# EAGLE board IR Thermometer (EAGLE 7.6.0)
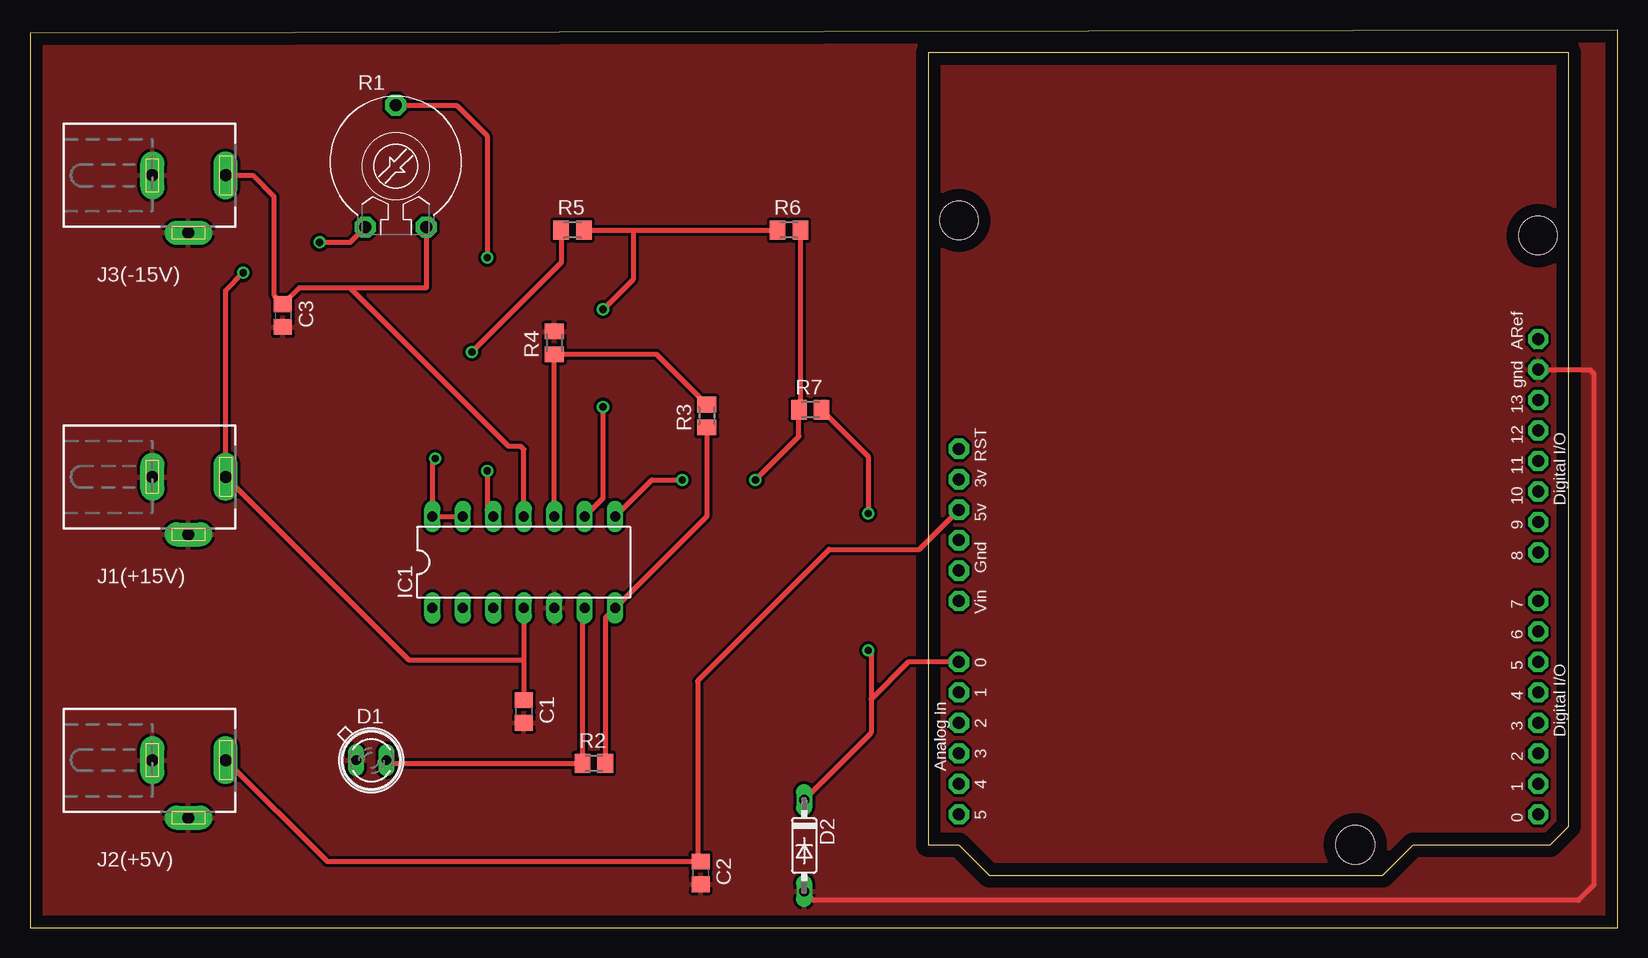
[diagram p0: board, top side]
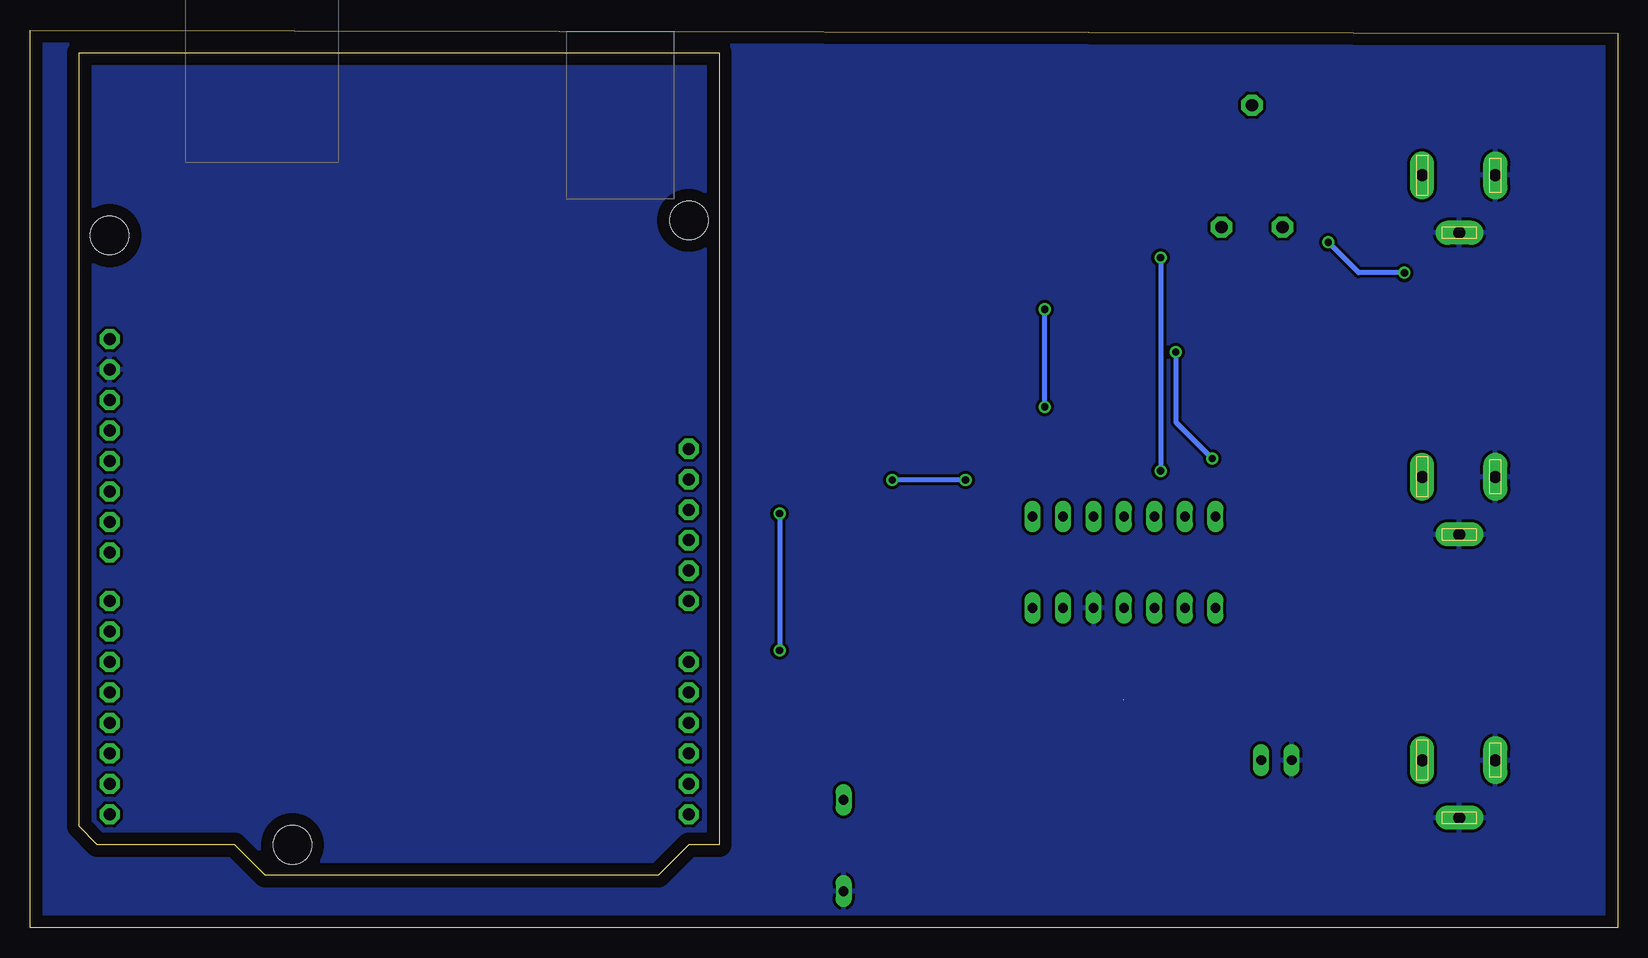
[diagram p1: board, bottom side, seen from below]

Size 132.31 x 74.85 mm. Coordinates in mm from the lower left corner, seen from the top.
Outline: 0,0 132.31,0 132.31,74.85 0,74.6 0,0
Copper layers (1*16): Top 0.035mm / dielectric 1.5mm / Bottom 0.035mm
Design rules "default *": minimum track width 10mil, minimum drill 20mil, track to track 8mil, track to pad 8mil, pad to pad 8mil, via to via 8mil, smd to smd 8mil, copper to edge 40mil, drill to drill 8mil, minimum pad ring 10mil, minimum via ring 8mil, stop-mask expansion 4mil, vias tented up to drill 0mil, thermal gap 10mil
Net classes: 0 default: width 0.305 mm, drill 0.508 mm, clearance 0.254 mm

## Footprints (pad centres in the part's own frame; a part is rotated, then mirrored left to right if it is on the bottom)
C0805 = smd 1.3 x 1.5: 1 -0.95,0; 2 0.95,0
SFH482 = drill 0.813 long: A -1.27,0; K 1.27,0
DO35-7 = drill 0.813 long: A 3.81,0; C -3.81,0
DIL14 = drill 0.813 long: 1 -7.62,-3.81; 2 -5.08,-3.81; 3 -2.54,-3.81; 4 0,-3.81; 5 2.54,-3.81; 6 5.08,-3.81; 7 7.62,-3.81; 8 7.62,3.81; 9 5.08,3.81; 10 2.54,3.81; 11 0,3.81; 12 -2.54,3.81; 13 -5.08,3.81; 14 -7.62,3.81
DCJ0202 = drill 1 pad 2 long: 1 0,3.1; 2 4.8,0; 3 0,-3
PT-10 = drill 1.016 pad 1.778 octagon: 1 -2.54,-5.08; 2 2.54,-5.08; 3 0,5.08
M0805 = smd 1.3 x 1.6: 1 -0.95,0; 2 0.95,0
ARDUINO = drill 1 pad 1.676 octagon: 3V 35.56,2.54; 5V 38.1,2.54; A0 50.8,2.54; A1 53.34,2.54; A2 55.88,2.54; A3 58.42,2.54; A4 60.96,2.54; A5 63.5,2.54; AREF 23.876,50.8; D0 63.5,50.8; D1 60.96,50.8; D2 58.42,50.8; D3 55.88,50.8; D4 53.34,50.8; D5 50.8,50.8; D6 48.26,50.8; D7 45.72,50.8; D8 41.656,50.8; D9 39.116,50.8; D10 36.576,50.8; D11 34.036,50.8; D12 31.496,50.8; D13 28.956,50.8; GND 26.416,50.8; GND1 43.18,2.54; GND2 40.64,2.54; RESET 33.02,2.54; VIN 45.72,2.54 | hole 3.2: 15.24,50.8; 66.04,35.56; 13.97,2.54

## Placement (x,y rotation side)
C1  0.1u  [C0805]  41.15,18.03 270 top
C2  0.1u  [C0805]  55.88,4.57 270 top
C3  0.1u  [C0805]  21.08,51.05 270 top
D1  SFH482  [SFH482]  28.45,13.97 0 top
D2  1N4148DO35-7  [DO35-7]  64.52,6.86 270 top
IC1  LM324N  [DIL14]  41.15,30.48 0 top
J1(+15V)  DCJ0202  [DCJ0202]  13.21,37.59 270 top
J2(+5V)  DCJ0202  [DCJ0202]  13.21,13.97 270 top
J3(-15V)  DCJ0202  [DCJ0202]  13.21,62.74 270 top
R1  [PT-10]  30.48,63.5 0 top
R2  1k  [M0805]  46.99,13.72 0 top
R3  1k  [M0805]  56.39,42.67 90 top
R4  1k  [M0805]  43.69,48.77 90 top
R5  1k  [M0805]  45.21,58.17 0 top
R6  1k  [M0805]  63.25,58.17 0 top
R7  1k  [M0805]  65.02,43.18 0 top
U$1  ARDUINOUNO  [ARDUINO]  74.87,72.95 270 top

## Library data of the parts
C1-C3 R2-R7 = resistor
D1 = led
D2 = diode
IC1 = linear
J1(+15V) J2(+5V) J3(-15V) = con-jack; OC_FARNELL: unknown; OC_NEWARK: unknown
R1 = rcl
U$1 = adafruit

## Nets
3V: U$1.3V
+5V: C2.1 J2(+5V).1 U$1.5V
+15V: C1.1 IC1.4 J1(+15V).1 R1.1
-15V: C3.1 IC1.11 J3(-15V).1 R1.2
GND: C1.2 C2.2 C3.2 D1.A D2.A IC1.5 J1(+15V).2 J1(+15V).3 J2(+5V).2 J2(+5V).3 J3(-15V).2 J3(-15V).3 R4.2 U$1.GND
GND1: U$1.GND1
GND2: U$1.GND2
N$3: D1.K IC1.6 R2.1
N$4: IC1.7 R2.2 R3.1
N$5: IC1.10 R3.2 R4.1
N$6: IC1.9 R5.2 R6.1
N$7: IC1.13 IC1.14 R5.1
N$8: IC1.8 R6.2 R7.1
N$9: D2.C R7.2 U$1.A0
N$10: IC1.12 R1.3
VIN: U$1.VIN

## Tracks (layer width: path | path; a pad name or v marks a point on that pad's centre or on a via)
+5V
  Top 0.406: J2(+5V).1 24.76,5.52 C2.1 55.63,5.78 55.63,20.57 66.6,31.55 74.11,31.55 U$1.5V
+15V  (via drill 0.6)  (1 unrouted)
  Top 0.305: 41.27,19.05 41.15,19.05
  Top 0.406: IC1.4 41.15,22.35 | 41.15,22.35 31.55,22.35 J1(+15V).1 16.31,53.14 v17.78,54.61 | v24.13,57.15 26.67,57.15 R1.1 | 41.15,22.35 C1.1
  Bottom 0.406: v17.78,54.61 21.59,54.61 v24.13,57.15
-15V
  Top 0.406: J3(-15V).1 18.54,62.74 20.32,60.96 20.32,52.77 C3.1 22.42,53.34 26.67,53.34 | R1.2 33.02,53.34 26.67,53.34 | IC1.11 41.15,39.88 40.89,40.13 39.88,40.13 26.67,53.34
GND
  Top 0.406: U$1.GND 129.99,46.54 130.3,46.23 130.3,3.56 129.03,2.29 65.28,2.29 D2.A
  pour Top: -2.54,78.74 -2.54,-5.08 134.62,-5.08 134.62,78.74
  pour Bottom: -5.08,82.3 -5.08,-9.14 138.43,-9.14 138.43,83.82 -5.08,83.82
N$3
  Top 0.406: D1.K 29.97,13.72 R2.1 46.04,26.48 IC1.6
N$4
  Top 0.406: R3.1 56.39,34.29 IC1.7 47.94,25.84 R2.2
N$5
  Top 0.406: IC1.10 R4.1 52.19,47.82 R3.2
N$6  (via drill 0.6)
  Top 0.406: R5.2 50.29,58.17 | 50.29,58.17 R6.1 | IC1.9 47.75,35.81 v47.75,43.43 | v47.75,51.56 50.29,54.1 50.29,58.17
  Bottom 0.406: v47.75,43.43 v47.75,51.56
N$7  (via drill 0.6)
  Top 0.406: IC1.13 IC1.14 33.53,38.86 v33.78,39.12 | R5.1 44.26,55.44 v36.83,48.01
  Bottom 0.406: v36.83,48.01 36.83,42.16 v33.78,39.12
N$8  (via drill 0.6)
  Top 0.406: R6.2 64.2,43.3 R7.1 64.07,40.96 v60.45,37.34 | IC1.8 51.82,37.34 v54.36,37.34
  Bottom 0.406: v54.36,37.34 v60.45,37.34
N$9  (via drill 0.6)
  Top 0.406: D2.C 70.1,16.26 70.1,19.05 | R7.2 69.85,39.3 v69.85,34.54 | v69.85,23.11 70.1,22.86 70.1,19.05 | U$1.A0 73.21,22.15 70.1,19.05
  Bottom 0.406: v69.85,34.54 v69.85,23.11
N$10  (via drill 0.6)
  Top 0.406: R1.3 35.56,68.58 38.1,66.04 v38.1,55.88 | v38.1,38.1 38.1,34.8 IC1.12
  Bottom 0.406: v38.1,55.88 v38.1,38.1